# Altium PCB Finger_IMU_PCB.PcbDoc
Units mm, origin at the board's own origin, x right, y up, seen from the top; angles counter-clockwise.
Board outline 13.46 x 12.06 mm, 2 copper layers (Top Layer, Bottom Layer); 8 components, 8 nets, 34 pads, 10 vias.
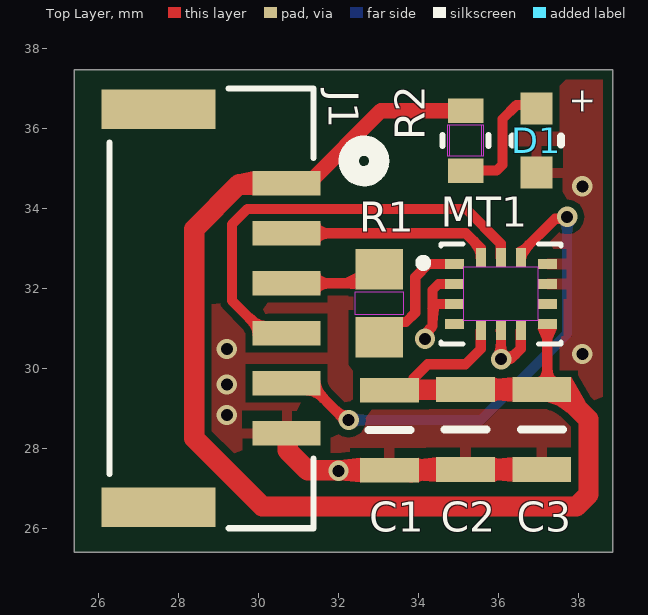
[diagram p0: Top Layer view]
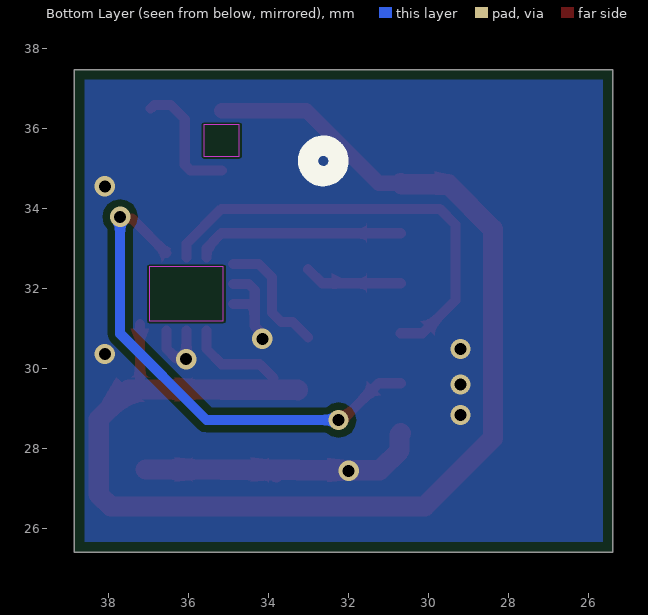
[diagram p1: Bottom Layer view, seen from below]
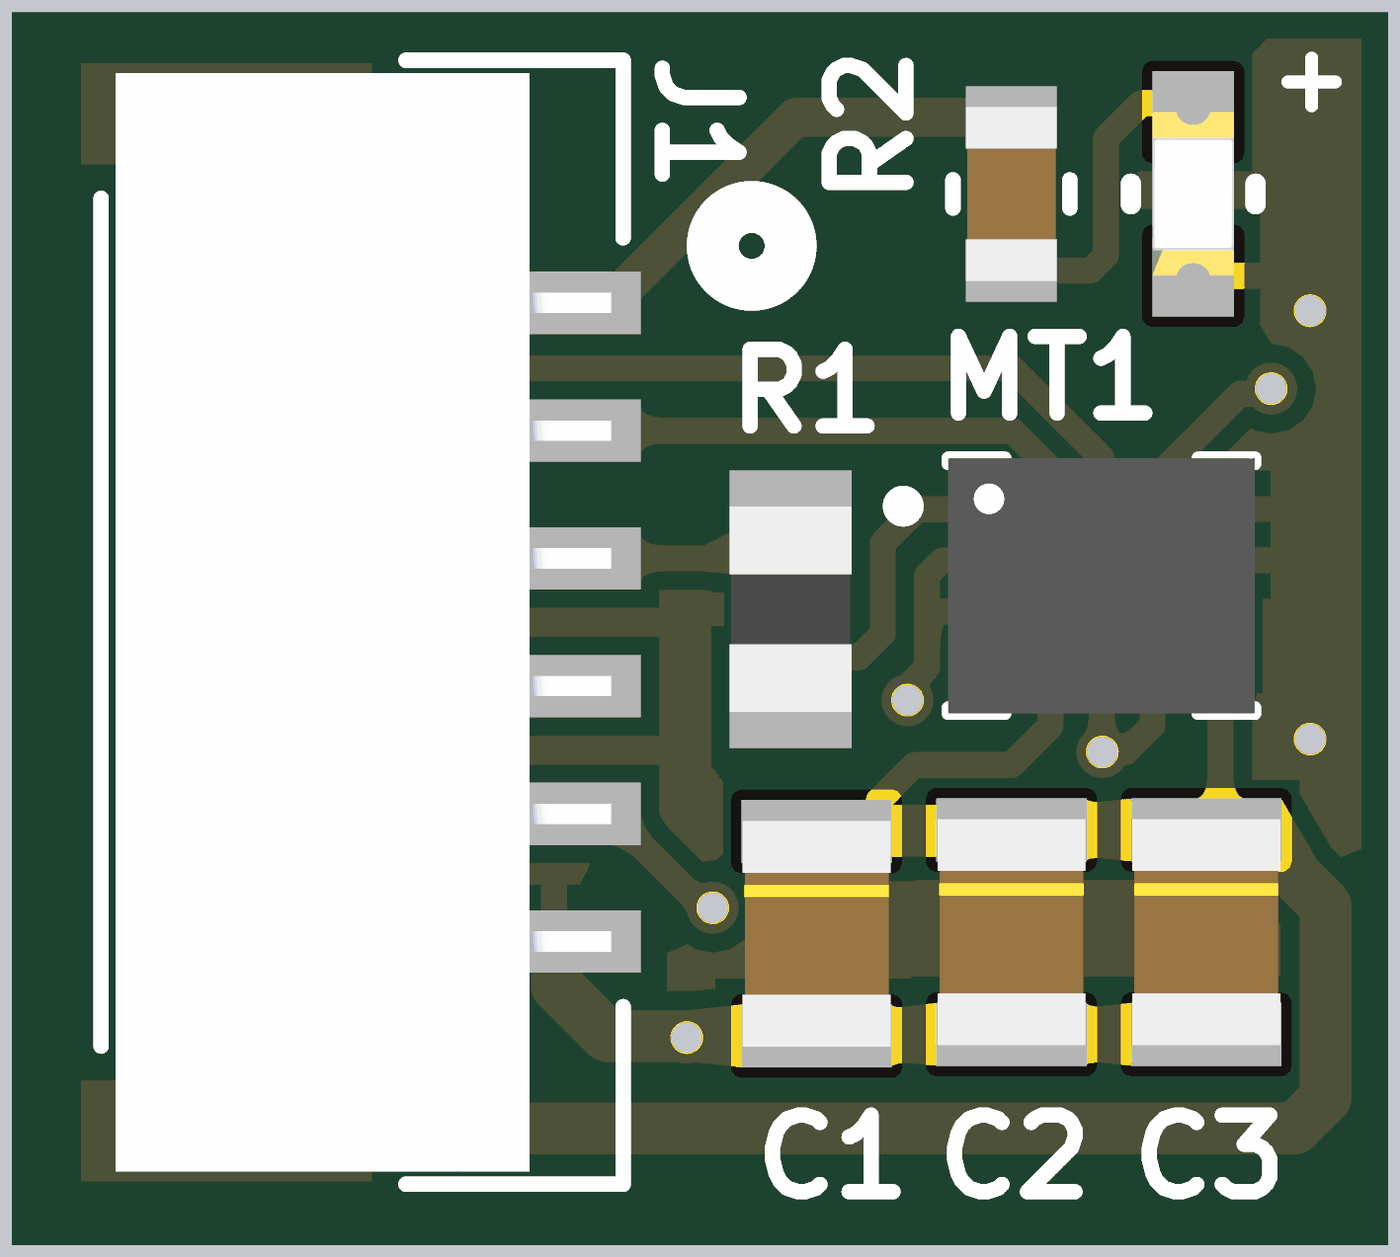
[diagram p2: 3D render of the assembled board from above, using the file's embedded part models]

## Layer stack, top to bottom
Top Solder: solder mask 0.0102, Solder Resist, Dk 3.5
Top Layer: signal copper 0.0356
Dielectric 1: dielectric 0.32, FR-4, Dk 4.8
Bottom Layer: signal copper 0.0356
Bottom Solder: solder mask 0.0102, Solder Resist, Dk 3.5

## Board outline
25.4,25.4 38.862,25.4 38.862,37.465 25.4,37.465

## Design rules (kind name [scope] priority, off if disabled: settings)
BoardOutlineClearance [All] p1: gap=0.254 ignorepadtopadclearanceinfootprint=FALSE
Clearance Clearance_KOL [IsKeepOut] p1: gap=0.051 ignorepadtopadclearanceinfootprint=FALSE
Clearance Clearance_KOL_1 [OnLayer('Keep-Out Layer')] p2: gap=0.051 ignorepadtopadclearanceinfootprint=FALSE
Clearance [All] p3: gap=0.178 ignorepadtopadclearanceinfootprint=FALSE
ComponentClearance ComponentClearance_ESP32 [All vs InComponent('U1')] p1: gap=0 collisioncheckmode=3 verticalgap=0 showdistances=FALSE
ComponentClearance [All] p2: gap=0.254 collisioncheckmode=3 verticalgap=0.254 showdistances=FALSE
MinimumSolderMaskSliver [All] p1: minsoldermaskwidth=0.127
PolygonConnect PolygonConnect_Stitch [isVia and InNet('GND')] p1: connectstyle=Direct reliefconductorwidth=0.254 reliefentries=4 polygonreliefangle="90 Angle" airgapwidth=0.254
PolygonConnect [All] p2: connectstyle=Relief reliefconductorwidth=0.254 reliefentries=4 polygonreliefangle="90 Angle" airgapwidth=0.254
RoutingVias [All] p1: holewidth=0.3 width=0.508 viastyle="Through Hole" minholewidth=0.254 minwidth=0.508 maxholewidth=0.4 maxwidth=0.508
SilkToSilkClearance [All] p1: silktosilkclearance=0.178
SolderMaskExpansion [All] p1: expansion=0.102 istentingtop=FALSE
Width [All] p1: maxlimit=1.27 minlimit=0.203 preferedwidth=0.254
27 further rules are at their usual default settings.

## Components (designator, comment, footprint, x,y, rotation, side; value= is the part's Value field where it differs from the comment)
C1 "KAM21BR71H104JM" CAPC2012X145N 33.274,28.448 r90 top value=0.1u
C2 "KAM21BR71H104JM" CAPC2012X145N 35.179,28.464 r90 top value=0.1u
C3 "C2012X7R1H225K125AE" CAPC2012X145N 37.084,28.464 r90 top value=2.2u
D1 "WL-SMCW_0603" WL-SMCW_0603 36.957,35.687 r90 top
J1 "SM06B-GHS-TB" CONN_SM06B-GHS-TB_JST 28.829,31.496 r270 top
MT1 "ICM-42670-P" XDCR_ICM-42670-P 36.06,31.853 r0 top
R1 "RC0805JR-07100RL" RC0805N_YAG 33.02,31.623 r270 top value=100
R2 "RT0603BRD0750RL" RES_RT0603_YAG 35.179,35.687 r90 top value=50

## Footprints (in the part's own frame and the unit in brackets; to place one, negate y for a bottom-side part, rotate by r counter-clockwise, add the part's x,y. Pads: shape width x height; smd on the part's side, far side on the other; paste and mask are expansions set on the pad)
CAPC2012X145N [mm]
  rect 0.62x1.47 smd: 1(-1,0) 2(1,0)
  silkscreen extent 0,-0.53 0,0.53, body extent -1.1,-0.72 1.1,0.72, height 1.5
CONN_SM06B-GHS-TB_JST [mil]
  rect 24x67 smd paste+0 mask+0: 1(-123.03,73.85) 2(-73.82,73.85) 3(-24.61,73.85) 4(24.61,73.85) 5(73.82,73.85) 6(123.03,73.85)
  rect 39x112 smd paste-56 mask-56: 7(-195.87,-52.14) 8(195.87,-52.14)
  silkscreen extent -217,-101 216,165, body extent -212,-95 212,96, height 167
RC0805N_YAG [mil]
  rect 40x47 smd paste+0 mask+0: 1(-33.5,0) 2(33.5,0)
  Top Layer keep-out region: -11.5,-23.5 -11.5,23.5 11.5,23.5 11.5,-23.5
  body extent -39,-24 39,24, height 28
RES_RT0603_YAG [mil]
  rect 24x35 smd paste+0 mask+0: 1(-29.5,0) 2(29.5,0)
  Top Layer keep-out region: -15.5,-15.5 -15.5,15.5 15.5,15.5 15.5,-15.5
  Keep-Out Layer region: -15.5,-17.5 -15.5,17.5 15.5,17.5 15.5,-17.5
  silkscreen extent -5,-22 5,22, body extent -34,-17 34,17, height 22
WL-SMCW_0603 [mm]
  rect 0.8x0.8 smd: 1(-0.8,0) 2(0.8,0)
  silkscreen extent -0.1,-0.61 0.1,0.61, body extent -0.8,-0.4 0.8,0.4, height 0.7
XDCR_ICM-42670-P [mm]
  rect 0.475x0.25 smd paste-1 mask+0.051: 1(-1.162,0.75) 2(-1.162,0.25) 3(-1.162,-0.25) 4(-1.162,-0.75) 8(1.162,-0.75) 9(1.162,-0.25) 10(1.162,0.25) 11(1.162,0.75)
  rect 0.25x0.475 smd paste-1 mask+0.051: 5(-0.5,-0.913) 6(0,-0.913) 7(0.5,-0.913) 12(0.5,0.913) 13(0,0.913) 14(-0.5,0.913)
  Keep-Out Layer region: 0.925,-0.675 -0.925,-0.675 -0.925,0.675 0.925,0.675
  silkscreen extent -2.04,-1.25 1.5,1.25, body extent -1.5,-1.25 1.5,1.25, height 0.81

## Part data
C1 C2: "Multilayer Ceramic Chip Capacitors, Capacitance=0.1u", Rated Voltage=50V, Manufacturer_Part_Number=KAM21BR71H104JM
C3: "Multilayer Ceramic Chip Capacitors, Capacitance=2.2u", Rated Voltage=50V, Manufacturer_Part_Number=C2012X7R1H225K125AE
D1: "0603, Yellow Typ.(@20mA): 590nm, 120mcd, 2.0V, 140Â° AlInGaP", Package="0603 Wurth Electronics", Check_prices=https://www.snapeda.com/parts/150060YS75000/Wurth+Electronics/view-part/?ref=eda, MF="Wurth Electronics", MP=150060YS75000, SnapEDA_Link=https://www.snapeda.com/parts/150060YS75000/Wurth+Electronics/view-part/?ref=snap
J1: "No Description Available", Manufacturer_Name=JST, Copyright="Copyright (C) 2025 Ultra Librarian. All rights reserved.", Manufacturer_Part_Number=SM06B-GHS-TB, RefDes=RefDes, Type=Type
MT1: Package=None, Availability=Unavailable, MP=ICM-42670-P, Price=None
R1: "RES 0805 100 5% 1/8W", Manufacturer_Name=Yageo, Tolerance=5%, Manufacturer_Part_Number=RC0805JR-07100RL
R2: "No Description Available", Manufacturer_Name=Yageo, Copyright="Copyright (C) 2025 Ultra Librarian. All rights reserved.", Manufacturer_Part_Number=RT0603BRD0750RL

## Via types
v1: diameter 0.508, hole 0.3, Top Layer to Bottom Layer, tented both sides, 10 vias

## Nets (pads, with @x,y where several pads share a name; then routed paths per layer and width w, separated by ;. In a path a pad name is that pad's centre, name@x,y a point inside that pad or via, vN(x,y) a via of type N, cw(c..) or ccw(c..) an arc to the next point about the centre after c; other vN are vias at no path point)
C\S\: J1.5 MT1.12 | length 12.7
  Top Layer w0.254: J1.5 31.251,29.621 32.121,28.751 32.209,28.751 v1(32.258,28.702) ; MT1.12@36.562,32.877 37.419,33.733 37.67,33.733 v1(37.719,33.782)
  Bottom Layer w0.254: v1(32.258,28.702) 35.56,28.702 37.719,30.861 v1(37.719,33.782)
GND: C1.1 C2.1 C3.1 D1.1 J1.6 MT1.2 MT1.3 MT1.6 MT1.7 MT1.10 MT1.11 | length 11.5
  Top Layer w0.254: v1@34.036,30.734 34.353,31.051 34.353,31.502 ; MT1.3 34.896,31.602 34.453,31.602 34.353,31.502 ; MT1.2 34.896,32.102 34.502,32.102 34.353,31.953 34.353,31.502 ; MT1.6 36.062,30.939 36.062,30.232 v1(36.068,30.226) 36.3,30.226 36.558,30.484 36.558,30.939 MT1.7
  Top Layer w0.381: C1.1@33.699,27.448 C1.1@33.818,27.329
  Top Layer w0.508: J1.6 30.734,28.342 30.734,27.94 31.226,27.448 C1.1 33.282,27.456 35.171,27.456 C2.1 C3.1
  other v1: 32.004,27.432 29.21,28.829 29.21,29.591 38.1,30.353 29.21,30.48 34.163,30.734 38.1,34.544
MOSI: J1.2 MT1.14 | length 5.2
  Top Layer w0.254: J1.2 35.187,33.371 35.56,32.998 MT1.14
NetD1_2: D1.2 R2.1 | length 3.2
  Top Layer w0.254: R2.1 35.954,34.938 36.102,35.086 36.102,36.229 36.449,36.576 36.868,36.576 D1.2
NetJ1_3: J1.3 R1.1 | length 2.5
  Top Layer w0.254: J1.3 32.667,32.121 R1.1
NetMT1_1: MT1.1 R1.2 | length 3.2
  Top Layer w0.254: R1.2 33.401,31.153 33.691,31.153 33.922,31.384 33.922,32.271 34.253,32.602 34.896,32.602 MT1.1
SCK: J1.4 MT1.13 | length 11.2
  Top Layer w0.254: J1.4 30.159,30.871 29.337,31.693 29.337,33.59 29.728,33.981 35.188,33.981 36.058,33.111 36.058,32.768 MT1.13
VCC: C1.2 C2.2 C3.2 J1.1 MT1.5 MT1.8 R2.2 | length 36
  Top Layer w0.254: C1.2 33.699,29.448 33.882,29.631 33.882,29.751 34.23,30.099 35.179,30.099 35.56,30.48 MT1.5 ; C3.2 37.222,29.602 MT1.8
  Top Layer w0.381: J1.1 31.251,34.621 33.066,36.436 R2.2
  Top Layer w0.508: J1.1 30.678,34.594 29.514,34.594 28.398,33.478 28.398,28.244 30.099,26.543 37.953,26.543 38.251,26.841 38.251,28.722 37.509,29.464 C3.2 C2.2 35.171,29.456 33.282,29.456 C1.2
pads on no net: J1.7 J1.8 MT1.4 MT1.9

## Polygon pours and split planes (outlines as drawn)
GND on Top Layer "GND_L01_P000" (solid, remove dead copper, pour order 0): 25.4,25.4 38.735,25.4 38.735,37.465 25.4,37.465
GND on Bottom Layer "GND_L02_P001" (solid, remove dead copper, pour order 1): 25.4,25.4 38.735,25.4 38.735,37.465 25.4,37.465

## Text inside footprints (layer, text, board x,y; h text height)
D1: Top Overlay "+" at 38.354,36.322 h0.61 r90; Mechanical 13 "+" at 38.354,36.322 h0.61 r90